# Altium PCB Sim908_Main Chip_Version 3.PcbDoc
Units mil, origin at the board's own origin, x right, y up, seen from the top; angles counter-clockwise.
Board outline 6000 x 4000 mil, 2 copper layers (Top Layer, Bottom Layer); 53 components, 0 nets, 237 pads, 78 vias.
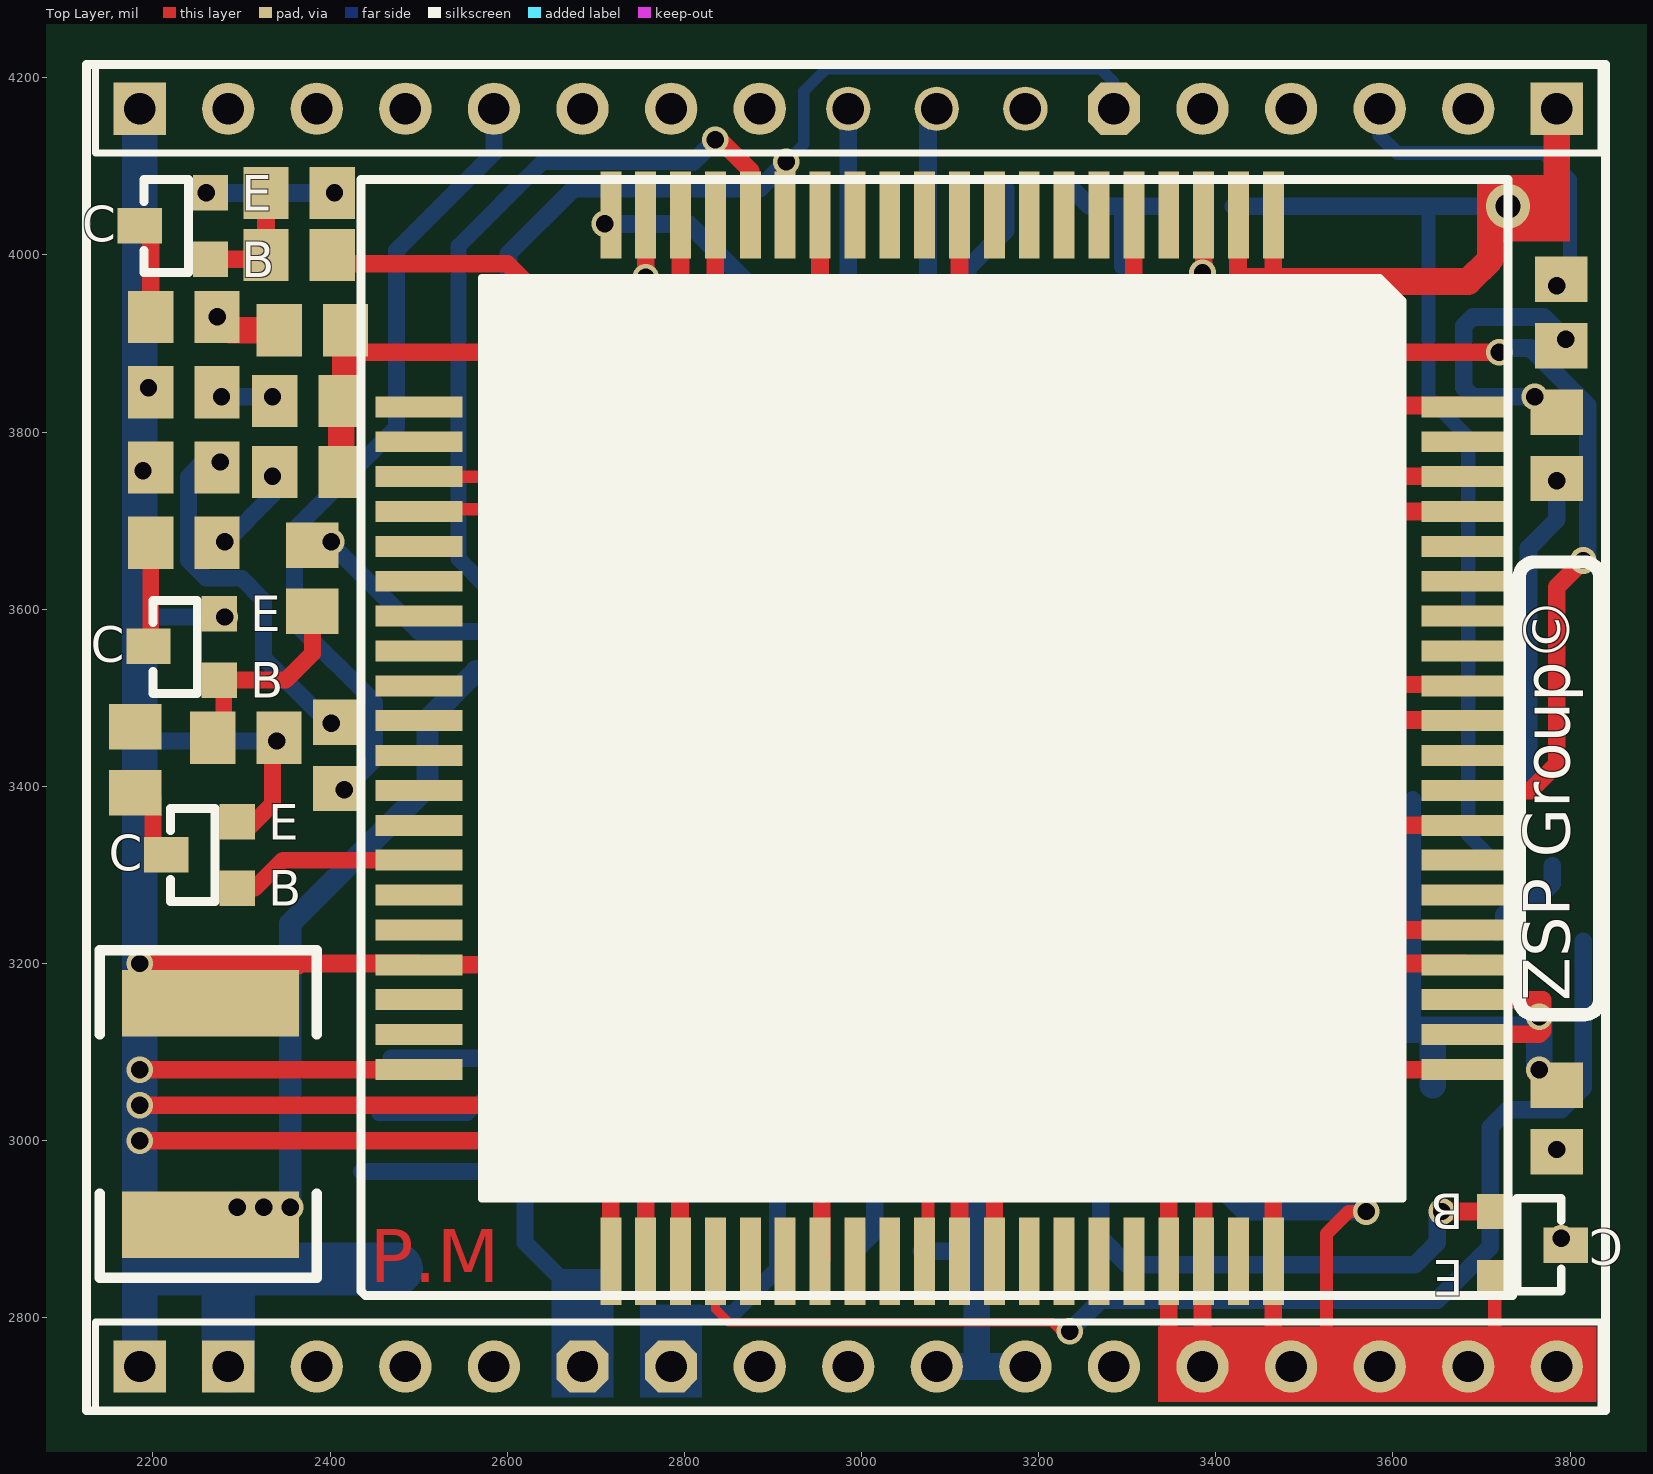
[diagram p0: Top Layer view]
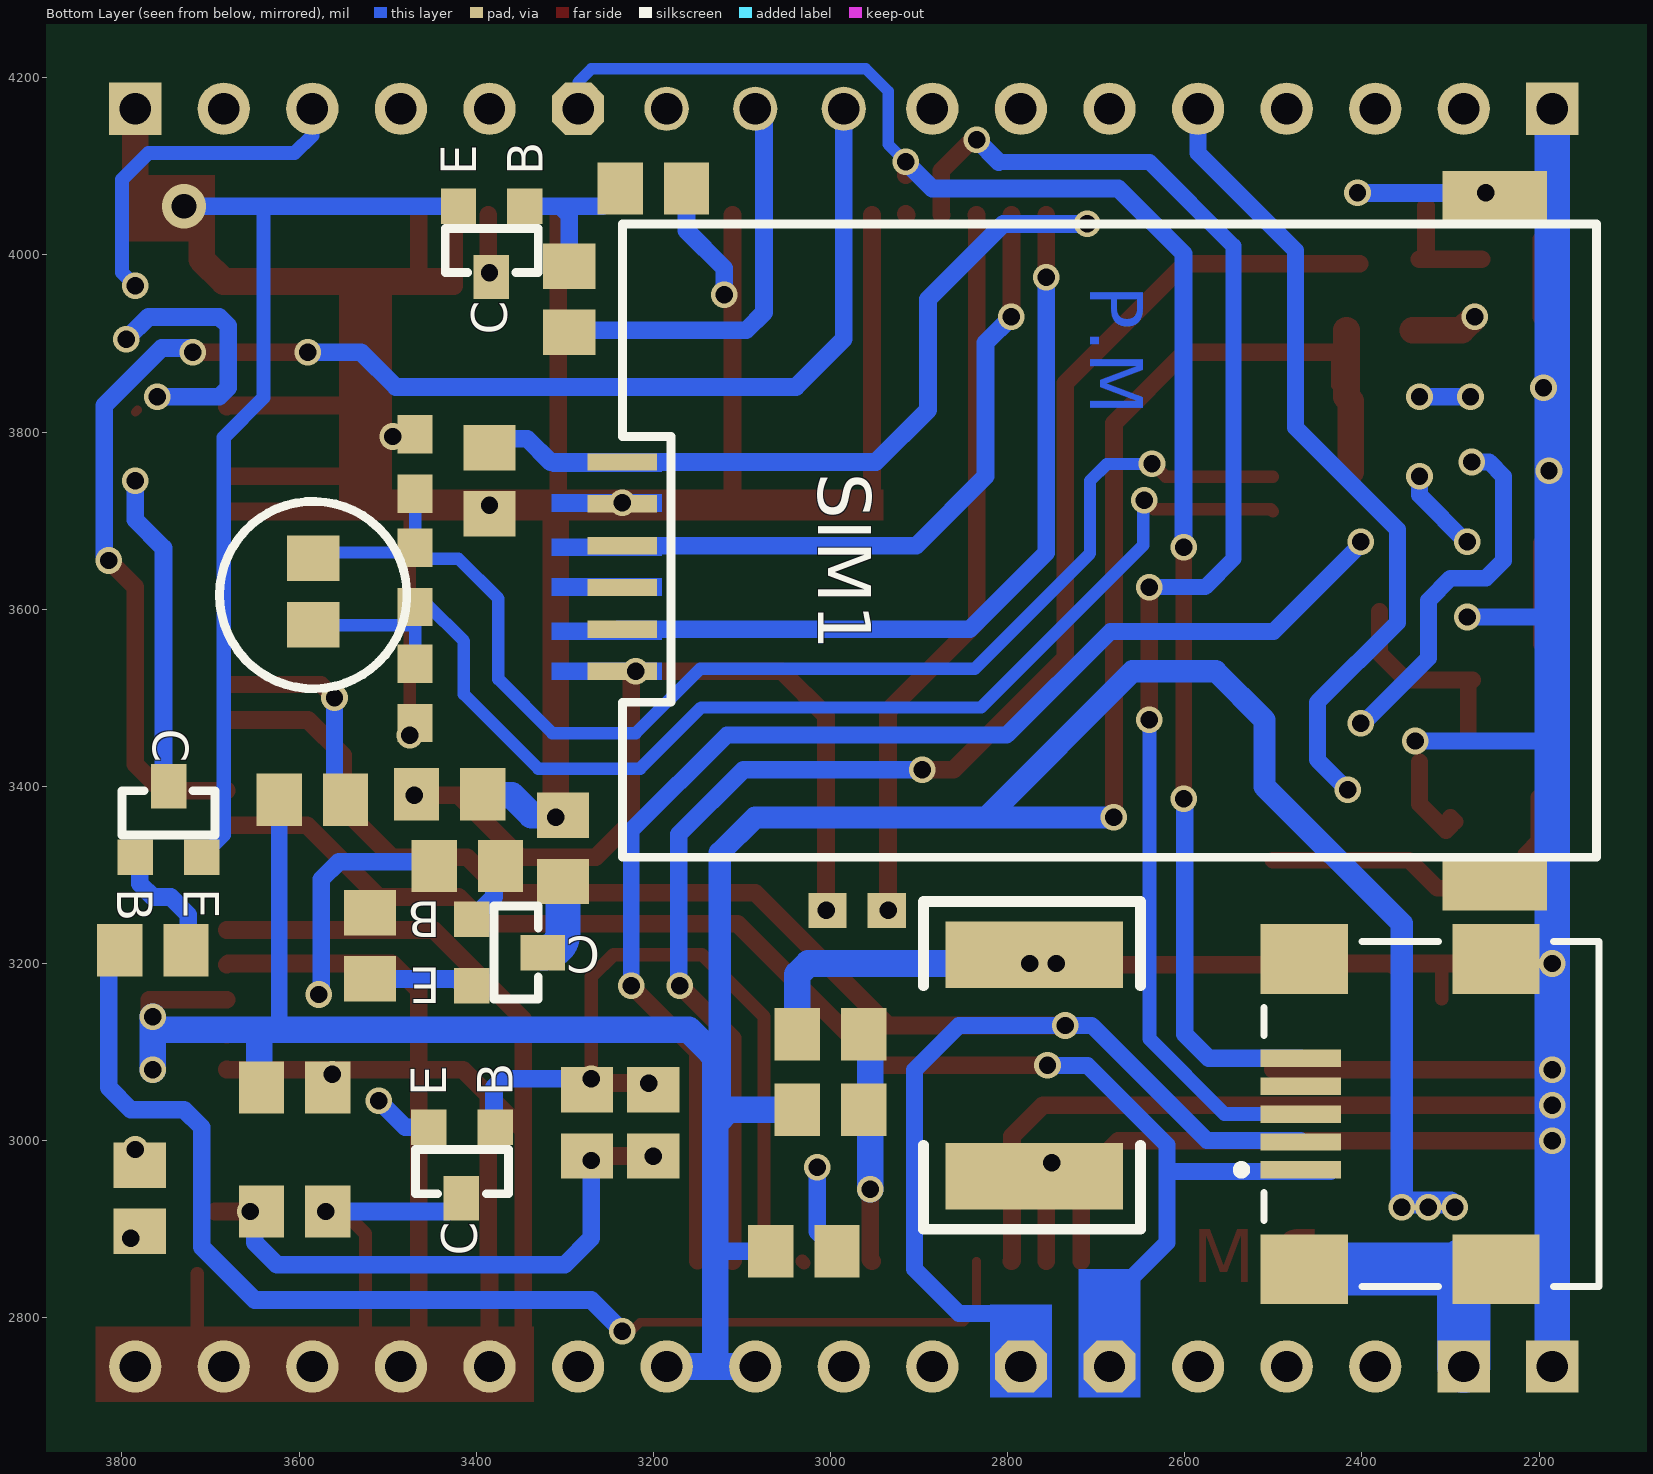
[diagram p1: Bottom Layer view, seen from below]

## Layer stack, top to bottom
Top Solder: solder mask 0.4, Solder Resist, Dk 3.5
Top Layer: signal copper 1.4
Dielectric1: dielectric 12.6, FR-4, Dk 4.8
Bottom Layer: signal copper 1.4
Bottom Solder: solder mask 0.4, Solder Resist, Dk 3.5

## Board outline
1000,1000 7000,1000 7000,5000 1000,5000

## Design rules (kind name [scope] priority, off if disabled: settings)
Clearance [All] p1: gap=10
PolygonConnect [All] p1: connectstyle=Relief reliefconductorwidth=10 reliefentries=4 polygonreliefangle="90 Angle" airgapwidth=10
RoutingVias [All] p1: holewidth=28 width=50 viastyle="Through Hole" minholewidth=28 minwidth=50 maxholewidth=28 maxwidth=50
SilkToSolderMaskClearance SilkscreenOverComponentPads [IsPad] p1: minsilkscreentomaskgap=10 clearancetoexposedcopper=TRUE
SolderMaskExpansion [All] p1: expansion=4
UnpouredPolygon [All] p1: allowunpoured=FALSE
Width [All] p1: maxlimit=10 minlimit=10 preferedwidth=10
28 further rules are at their usual default settings.

## Components (designator, comment, footprint, x,y, rotation, side; value= is the part's Value field where it differs from the comment)
SIM1 "SIMCard1" SIMCard1 3235,3530 r270 bottom locked
? "Comment" 2012[0805] 3584,3620 r90 bottom
? "Comment" 1608[0603] 3469,3505 r270 bottom
? "Comment" 1608[0603] 3469,3636 r270 bottom
? "Comment" 1608[0603] 3469,3764 r270 bottom
? "Comment" 2012[0805] 3302,3330 r270 bottom
? "Comment" 1608[0603] 2970,3260 r0 bottom
? "Comment" Sim908 3465,4045 r270 top locked
? "Comment" 2012[0805] 2180,3430 r270 top
? "Comment" SMD-tr 2295,3285 r0 top
? "Comment" SMD-tr 2275,3520 r0 top
? "Comment" 2012[0805] 2305,3455 r180 top
? "Comment" 2012[0805] 2380,3635 r90 top
? "Comment" 2012[0805] 3585,3385 r0 bottom
? "Comment" 2012[0805] 2375,3835 r180 top
? "Comment" SMD-tr 2265,3995 r0 top
? "Comment" 2012[0805] 2365,4000 r180 top
? "Comment" 2012[0805] 2365,4070 r180 top
? "Comment" 2012[0805] 2235,3675 r180 top
? "Comment" 2012[0805] 2235,3760 r180 top
? "Comment" 2012[0805] 2235,3845 r180 top
? "Comment" 2012[0805] 2235,3930 r180 top
? "Comment" 2012[0805] 3000,3035 r0 bottom
? "Comment" 2012[0805] 3000,3120 r0 bottom
? "Comment" 2012[0805] 3295,3950 r90 bottom
? "Comment" SMD-tr 3345,4055 r90 bottom
? "Comment" 2012[0805] 3200,4075 r180 bottom
? "Comment" HDR1X17#1 2185,2745 r0 top
? "Comment" HDR1X17#2 2185,4165 r0 top
? "Comment" USB/SM0.8-6H5 2160,3030 r180 bottom
? "Comment" 2012[0805] 3385,3745 r270 bottom
? "Comment" 2012[0805] 3430,3391 r0 bottom
? "Comment" 2220#1 2770,3110 r270 bottom
? "Comment" 2012[0805] 2380,3915 r180 top
? "Comment" 2012[0805] 2375,3755 r180 top
? "Comment" 2012[0805] 2410,3435 r270 top
? "Comment" 2012[0805] 3785,3025 r90 top
? "Comment" 2012[0805] 3275,3020 r270 bottom
? "Comment" SMD-tr 3715,2920 r180 top
? "Comment" 2012[0805] 3780,2935 r270 bottom
? "Comment" 2012[0805] 3605,3060 r0 bottom
? "Comment" 2012[0805] 3605,2920 r180 bottom
? "Comment" 2220#2 2265,3155 r270 top
? "Comment" SMD-tr 3785,3320 r270 bottom
? "Comment" 2012[0805] 3765,3215 r0 bottom
? "Comment" 2012[0805] 3790,3935 r90 top
? "Comment" 2012[0805] 3785,3785 r270 top
? "Comment" 2012[0805] 3410,3310 r0 bottom
? "Comment" 2012[0805] 3520,3220 r90 bottom
? "Comment" SMD-tr 3405,3250 r0 bottom
? "Comment" SMD-tr 3378.7,3015 r90 bottom
? "Comment" 2012[0805] 3200,3020 r270 bottom
? "Comment" 2012[0805] 3030,2875 r0 bottom

## Footprints (in the part's own frame and the unit in brackets; to place one, negate y for a bottom-side part, rotate by r counter-clockwise, add the part's x,y. Pads: shape width x height; smd on the part's side, far side on the other; paste and mask are expansions set on the pad)
1608[0603] [mm] "Chip Capacitor; Body 1.6 x 0.8 mm (LxW typ)"
  rect 1.1x1 smd: 1(-0.85,0) 2(0.85,0)
2012[0805] [mm] "Chip Resistor; Body 2.0 x 1.3 mm (LxW typ)"
  rect 1.3x1.5 smd: 1(-0.95,0) 2(0.95,0)
2220#1 [mil]
  rect 75x200 smd: 1(-100,0) 2(150,0)
  silkscreen extent -160,-125 210,120
2220#2 [mil]
  rect 75x200 smd: GND(0,0) VCC(250,0)
  silkscreen extent -60,-125 310,120
HDR1X17#1 [mm] "Connector; Header; 17 Position"
  round 1.5 hole 0.9: 3(5.08,0) 4(7.62,0) 5(10.16,0) 8(17.78,0) 9(20.32,0) 12(27.94,0) GND(33.02,0) GND(35.56,0) GND(38.1,0) GND(40.64,0) GND13(30.48,0) VCC10(22.86,0) VCC11(25.4,0)
  rect 1.5x1.5 hole 0.9: GND(0,0) GND(2.54,0)
  oct 1.5x1.5 hole 0.9: RX6(12.7,0) TX7(15.24,0)
  silkscreen extent -1.27,-1.27 41.91,1.27
HDR1X17#2 [mm] "Connector; Header; 17 Position"
  rect 1.5x1.5 hole 0.9: 1(0,0) 17(40.64,0)
  round 1.5 hole 0.9: 2(2.54,0) 3(5.08,0) 4(7.62,0) 5(10.16,0) 6(12.7,0) 7(15.24,0) 8(17.78,0) 13(30.48,0) 14(33.02,0) 15(35.56,0) 16(38.1,0)
  round 1.27 hole 0.9: 9(20.32,0) 10(22.86,0) 11(25.4,0)
  oct 1.5x1.5 hole 0.9: 12(27.94,0)
  silkscreen extent -1.27,-1.27 41.91,1.27
Sim908 [mm]
  rect 2.5x0.6 smd: 1(0,0) 2(0,-1) 3(0,-2) 4(0,-3) 5(0,-4) 6(0,-5) 7(0,-6) 8(0,-7) 9(0,-8) 10(0,-9) 11(0,-10) 12(0,-11) 13(0,-12) 14(0,-13) 15(0,-14) 16(0,-15) 17(0,-16) 18(0,-17) 19(0,-18) 20(0,-19) 41(30,-19) 42(30,-18) 43(30,-17) 44(30,-16) 45(30,-15) 46(30,-14) 47(30,-13) 48(30,-12) 49(30,-11) 50(30,-10) 51(30,-9) 52(30,-8) 53(30,-7) 54(30,-6) 55(30,-5) 56(30,-4) 57(30,-3) 58(30,-2) 59(30,-1) 60(30,0)
  rect 0.6x2.5 smd: 21(5.5,-24.5) 22(6.5,-24.5) 23(7.5,-24.5) 24(8.5,-24.5) 25(9.5,-24.5) 26(10.5,-24.5) 27(11.5,-24.5) 28(12.5,-24.5) 29(13.5,-24.5) 30(14.5,-24.5) 31(15.5,-24.5) 32(16.5,-24.5) 33(17.5,-24.5) 34(18.5,-24.5) 35(19.5,-24.5) 36(20.5,-24.5) 37(21.5,-24.5) 38(22.5,-24.5) 39(23.5,-24.5) 40(24.5,-24.5) 61(24.5,5.5) 62(23.5,5.5) 63(22.5,5.5) 64(21.5,5.5) 65(20.5,5.5) 66(19.5,5.5) 67(18.5,5.5) 68(17.5,5.5) 69(16.5,5.5) 70(15.5,5.5) 71(14.5,5.5) 72(13.5,5.5) 73(12.5,5.5) 74(11.5,5.5) 75(10.5,5.5) 76(9.5,5.5) 77(8.5,5.5) 78(7.5,5.5) 79(6.5,5.5) 80(5.5,5.5)
  silkscreen extent 1.79,-22.72 28.22,3.71
SIMCard1 [mm]
  rect 1.524x3 smd: 0(-13.589,25.019) 0(6.096,25.019)
  rect 0.5x2 smd: 1(SIM-VCC)(-6,0) 2(SIM_RST)(-3.6,0) 3(SIM_CLK)(-1.2,0) 4(GND)(-4.8,0) 5(-2.4,0) 6(SIM_DATA)(0,0)
  silkscreen extent -12.83,0 5.33,27.94
SMD-tr [mil]
  rect 40x40 smd: 1(0,0) 2(0,75)
  rect 50x40 smd: 3(-80,38)
  silkscreen extent -75,-15 -25,90
USB/SM0.8-6H5 [mm] "Connector; USB2.0, Type B, SM; 5 Position; Right Angle"
  rect 2.3x0.5 smd: 1(-7.85,-1.6) 2(-7.85,-0.8) 3(-7.85,0) 4(-7.85,0.8) 5(-7.85,1.6)
  rect 2.5x2 smd: 6(-7.75,4.45) 7(-2.25,4.45) 8(-7.75,-4.45) 9(-2.25,-4.45)
  round 0 all layers, no hole: MH1(-5.25,2.2) MH2(-5.25,-2.2)
  silkscreen extent -9.68,-4.95 0.7,4.95

## Via types
v1: diameter 30, hole 19.68, Top Layer to Bottom Layer, tented both sides, 62 vias
v2: diameter 30, hole 19.68, Top Layer to Bottom Layer, 15 vias
v3: diameter 50, hole 28, Top Layer to Bottom Layer, tented both sides, 1 vias

## Nets (pads, with @x,y where several pads share a name; then routed paths per layer and width w, separated by ;. In a path a pad name is that pad's centre, name@x,y a point inside that pad or via, vN(x,y) a via of type N, cw(c..) or ccw(c..) an arc to the next point about the centre after c; other vN are vias at no path point)
pads on no net: ?.1 ?.2 ?.3 ?.4 ?.5 ?.6 ?.7 ?.8 ?.9 ?.10 ?.11 ?.12 ?.13 ?.14 ?.15 ?.16 ?.17 ?.18 ?.19 ?.20 ?.21 ?.22 ?.23 ?.24 ?.25 ?.26 ?.27 ?.28 ?.29 ?.30 ?.31 ?.32 ?.33 ?.34 ?.35 ?.36 ?.37 ?.38 ?.39 ?.40 ?.41 ?.42 ?.43 ?.44 ?.45 ?.46 ?.47 ?.48 ?.49 ?.50 ?.51 ?.52 ?.53 ?.54 ?.55 ?.56 ?.57 ?.58 ?.59 ?.60 ?.61 ?.62 ?.63 ?.64 ?.65 ?.66 ?.67 ?.68 ?.69 ?.70 ?.71 ?.72 ?.73 ?.74 ?.75 ?.76 ?.77 ?.78 ?.79 ?.80 ?.GND ?.GND13 ?.MH1 ?.MH2 ?.RX6 ?.TX7 ?.VCC ?.VCC10 ?.VCC11 SIM1.0 SIM1.1(SIM-VCC) SIM1.2(SIM_RST) SIM1.3(SIM_CLK) SIM1.4(GND) SIM1.5 SIM1.6(SIM_DATA)
copper on no net: | length 45195.2
  Top Layer w10: 2412.4,3835 2430,3852.6 2430,3890 ; 2835.08,2863.9 2835,2863.82 2835,2810 2850,2795 3215,2795 3225,2785 v1(3235,2785) ; v1(3220,3530) v1@3225,3525 ; v1@3385,3970 v1(3385,3980) ; 3782.4,3825 3785,3822.4
  Top Layer w14: 2500.43,3710.35 2503.08,3713 2635,3713 v1@2648,3726 ; 2500.43,3749.72 2621.72,3749.72 v1@2636,3764 ; v1(3475,3457.54) 3475,3722 3476,3723
  Top Layer w15: 2220,3175 2220,3195 2225,3200 ; 2260,3175 2260,3200 ; 2305,3200 2310,3195 2310,3160 ; 2360,3200 2365,3195 ; 3030,2861.97 3031.93,2863.9 ; 3071.3,2863.9 3075,2867.6 3075,2955 3075,3140 3145,3210 3245,3210 3270,3185 v1@3270,3065 ; 3525,2770 3525,2895 3550,2920 v1(3570,2920) ; 3715,2760 3715,2850
  Top Layer w19: 2197.6,3560.6 2197.6,3675 ; 2200,3387.6 2200,3338 2215,3323 ; 2280,3455 2280,3515 2275,3520 2350,3520 2380,3550 2380,3597.6 ; 2295,3285 2315,3285 2346.65,3316.65 2500.43,3316.65 ; 2295,3360 2300,3365 2300,3355 2305,3350 2335,3380 2335,3427.6 ; v1(2601.2,3386.2) v1@2601.2,3670 ; 3150.04,2863.9 3150,2863.94 3150,3060 3150,3100 v1(3225,3175) ; v1(3560,3500) 3575,3515 3680.04,3515 3681.54,3513.5
  Top Layer w20: v1(2185,3000) 2675,3000 2716.97,2958.03 2716.97,2863.9 ; v1(2185,3040) 2760,3040 2795,3005 2795,2864.61 2795.71,2863.9 ; v1(2185,3080) 2500,3080 2500.43,3080.43 ; v1(2185,3200) 2498.98,3200 2500.43,3198.54 2748.54,3198.54 v1@2750,3200 ; 2197.6,3930 2197.6,4017.6 ; 2265,3995 2335,3995 ; 2327.6,4000 2327.6,4055 ; 2402.4,3990 2600,3990 2735,3855 2735,3545 2861.2,3418.8 v1(2896.2,3418.8) ; 2430,3890 2600,3890 2680,3810 2680,3690 v1(2680,3365) ; v1(2640,3475) v1(2640,3625) ; v1(2735,3130) 2935,3130 3085,3280 3370,3280 3410,3320 3495,3320 3550,3375 3550,3435 3590,3475 3680.67,3475 3681.54,3474.13 ; v1@2747.5,2972.5 2756.34,2963.66 2756.34,2863.9 ; v1@2749.27,3199.27 2774.27,3199.27 v1(2775,3200) ; v1(2755,3085) 2945,3085 3105,3245 3390,3245 3420,3275 3510,3275 3580,3345 3591.02,3356.02 3681.54,3356.02 ; v1(2756.34,3975) 2756.34,4045 ; 2785,4165 2805,4165 ; v1(2795.71,3930) 2795.71,4045 ; 2835.08,4045 2835,4044.92 2835,3585 2910,3510 ; v1@2840,4130 2875,4095 2875,4045.55 2874.45,4045 ; 2900,3520 2935,3485 v1(2935,3260) ; 2913.82,4045 2915,4046.18 ; 2915,4090 v1(2915,4105) ; 2953.19,2863.9 2955,2865.71 v1(2955,2945) ; 2953.19,4045 2953.19,3721.81 2955,3720 v1(3235,3720) 3244.65,3710.35 3681.54,3710.35 ; v1(3005,3260) 3005,3480 3055,3530 v1(3220,3530) ; 3110,2864.57 3110.67,2863.9 3110.67,3115.67 v1(3170,3175) ; 3110.67,3724.33 3110.67,4045 ; v1(3200,2982.6) 3265,2982.6 v1(3270,2977.6) ; v1(3205,3065) 3265,3065 v1(3270,3070) ; v1@3225,3525 3225,3360 3265,3320 3350,3320 3420,3390 v1@3467.4,3390 ; 3307.52,3720 3307.52,3982.52 3307.52,4045 ; 3346.89,2761.89 3346.89,2863.9 3346.89,3011.89 3415,3080 3530,3080 3681.1,3080 3681.54,3080.43 ; 3346.89,3000 3346.89,3136.89 3447.91,3237.91 3681.54,3237.91 ; 3385,2745 3385,2755 3385,2862.64 3386.26,2863.9 ; 3385,2865.16 3386.26,2863.9 ; v1(3385,3980) 3386.26,3981.3 3386.26,4045 ; 3386.26,3050 3386.26,2863.9 ; 3425,3965 3425,4044.37 3425.63,4045 ; 3465,2745 3465,2863.9 3465,3080 3465,3170 3495,3200 3680.08,3200 3681.54,3198.54 ; 3465,4045 3465,3975 3470,3970 ; 3540,3750 3681.26,3750 3681.54,3749.72 ; 3540,3830 3680,3830 3681.54,3828.46 ; v1(3590,3890) v1(3720,3890) ; v1(3655,2920) 3695,2920 ; 3681.54,3119.8 3681.73,3120 3765,3120 3769.17,3124.17 3769.17,3159.17 3681.54,3159.17 ; 3681.54,3395.39 3681.93,3395 3755,3395 3785,3425 3785,3625 v1(3815,3655)
  Top Layer w30: v1(2272.4,3930) 2287.4,3915 2342.6,3915 ; 2412.4,3755 2412.4,3835 ; 2417.4,3840 2417.4,3915 ; v1(3235,3720) 3310,3720 3540,3720 3540,3970 ; v1(3310,3365) 3310,3710.35 ; 3430,3970 3685,3970 3710,3995 3710,4052.6 3712.4,4055 3765,4055 3785,4075 3785,4165
  Bottom Layer w10: 3285,4165 3285,4195 ; 3295,3987.4 3307.6,4000 ; 3315,3765 3316.22,3766.22 ; 3415,4055 3420,4055 ; 3717.6,3230 3725,3237.4 ; 3750,3420 3760,3410
  Bottom Layer w13: v1(2915,4105) 2935,4125 2935,4165 2935,4185 2960,4210 3000,4210 3270,4210 3285,4195
  Bottom Layer w14: v1(2637,3764) 2688,3764 2707,3745 2707,3663 2837,3533 3147,3533 3220,3460 3314,3460 3375,3521 3375,3612 3420,3657 3466,3657 ; v1(2646,3723) 2647,3722 2647,3672 2830,3489 3146,3489 3215,3420 3330,3420 3414,3504 3414,3564 3456,3606 ; 3469,3538.46 3469,3602.54 ; 3469,3730.54 3469,3669.46 3474.46,3664 3574,3664 ; 3472,3582 3569,3582 3573,3586
  Bottom Layer w15: 3642.4,3060 3645,3062.6 ; v1(3270,2977.6) 3272.4,2980 v1(3270,2977.6)
  Bottom Layer w16: 2455,3030 2555,3030 2640,3115 2640,3205 2640,3315 v1(2640,3475) ; 3585,4165 3585,4135 3605,4115 3770,4115 3800,4085 3800,3980 v1(3785,3965) ; 3640,4055 3640,3925 3640,3839 3685,3794 3685,3345 3710,3320
  Bottom Layer w18: v1(2640,3625) 2577,3625 2545,3657 2545,4010 2640,4105 2810,4105
  Bottom Layer w19: 2190,3585 2196.2,3591.2 v2(2281.2,3591.2) ; 2201.2,3451.2 v2(2340,3451.2) ; v2(2276.2,3766.2) 2256.2,3766.2 2240,3750 2240,3655 2260,3635 2300,3635 2325,3610 2325,3545 v2@2400,3470 ; v2@2281.2,3675 2335,3728.8 v2(2335,3750) ; v2@2400,3675 2500,3575 2684,3575 2801,3458 3117,3458 3225,3350 v1(3225,3175) ; v2@2415,3395 2450,3430 2450,3495 2360,3585 2360,3690 2390,3720 2475,3805 2475,4005 2585,4115 2585,4165 ; 2435.55,2965 2620,2965 2620,2990 ; 2469.06,3000 2575,3000 2705,3130 v1(2735,3130) 2855,3130 2870,3115 2905,3080 2905,2855 2855,2805 2800,2805 ; 2685,2745 2680,2750 2680,2825 2620,2885 2620,2995 2710,3085 v1(2755,3085) ; 2785,2745 2785,2760 ; 3560,3380 v1(3560,3500) ; 3622.4,3130 3622.4,3385
  Bottom Layer w20: v2(2277.4,3840) v2(2335,3840) ; 2280,4070 v1@2402.4,4070 ; 2469.06,3092.99 2572.99,3092.99 2600,3120 v1@2600,3385 ; v1@2601.34,3670 2601.34,4001.34 2675,4075 2735,4075 2885,4075 v1(2915,4105) ; v1(2710,4035) 2805,4035 2890,3950 2890,3825 2948.78,3766.22 3240,3766.22 3316.22,3766.22 3342.4,3792.4 3385,3792.4 ; v1(2756.34,3975) 2756.34,3663.66 2842.76,3577.24 3240,3577.24 ; v1(2795.71,3930) 2825,3900.71 2825,3750 2903.27,3671.73 3240,3671.73 ; 2810,4105 v1(2835,4130) ; v1(2896.2,3418.8) 3098.2,3418.8 3171.2,3345.8 v1@3171.2,3175 ; 2985,4165 2985,3905 3039,3851 3491,3851 3530,3890 v1(3590,3890) ; 2992.6,2875 3015,2897.4 3015,2960 v1(3015,2970) ; 3067.4,2875 3130,2875 ; 3085,4165 3075,4155 3075,3935 3095,3915 3292.6,3915 3295,3912.6 ; v1(3120,3955) 3120,3985 3162.6,4027.6 3162.6,4075 ; 3125,3025 3130,3020 ; 3135,3015 3135,3100 ; v1(3235,2785) 3270,2820 3650,2820 3710,2880 3710,3015 3730,3035 3790,3035 3815,3060 3815,3225 ; 3237.4,4075 3257.4,4055 3345,4055 3305,4055 3295,4045 3295,3987.4 ; v1@3270,2990 3270,2890 3300,2860 3400,2860 3625,2860 3650,2885 3650,2915 v1(3655,2920) ; 3290,3070 3370,3070 3380,3060 3380,3016.3 3378.7,3015 3370,3023.7 ; 3380,3300 3380,3275 3405,3250 ; 3415,3175 3422.6,3182.6 3520,3182.6 ; 3416.7,2935 3431.7,2920 v1@3567.6,2920 ; 3420,4055 v3(3730,4055) ; 3453.7,3015 3480,3015 v1(3510,3045) ; v1@3575,3165 3575,3295 3555,3315 3452.4,3315 ; v1@3720,3895 3755,3895 3820,3830 3820,3660 v1(3815,3655) ; 3725,3237.4 3725,3255 3745,3275 3765,3275 3780,3290 3780,3310 ; 3753,3410 3753,3669 3785,3701 v1(3785,3745) ; v1(3760,3840) 3690,3840 3680,3850 3680,3920 3690,3930 3770,3930 v1(3795,3905) ; 3452.4,3315 3447.4,3310 3452.4,3315
  Bottom Layer w25: v2(2295,2925) 2300,2930 v1@2355,2930 ; v1(2355,2925) 2355,3245 2510,3400 2510,3475 2565,3530 2659,3530 2824,3365 2870,3365 ; v1(2680,3365) 3085,3365 3125,3325 3125,3025
  Bottom Layer w30: 2835,3200 3025,3200 3037.4,3187.6 3037.4,3120 ; v1(2955,2945) 2955,3117.4 2967.6,3130 ; 3037.4,3035 3115,3035 3130,3020 3130,2745 ; 3085,2745 3185,2745 ; 3135,3100 3160,3125 3765,3125 ; v1@3305,3367.6 3337.6,3367.6 3360,3390 3392.6,3390 ; 3645,3062.6 3645,3125 ; v1(3765,3080) v1(3765,3140)
  Bottom Layer w40: 2185,2745 2185,4165 ; 3302,3292.6 3302,3235 ccw(c3325,3235) 3325,3212
  Bottom Layer w60: 2200,2855 2475,2855 ; 2285,2745 2285,2860
  other v1: 2325,2925 2750,2975 3562.6,3075 3577.6,3165 2745,3200 3470,3390 2601,3670 3385,3717.6 3494,3795 2260,4070 2405,4070
  other v2: 3790,2890 3785,2990 2416.2,3396.2 2401.2,3471.2 2281.2,3676.2 2401.2,3676.2 2188.8,3756.2 2195,3850

## Other copper
Top Layer:
  rectangle: 3495,3705 3555,3985
  rectangle: 3695,4015 3800,4090
  rectangle: 3335,2705 3830,2790
  rectangle: 3410,2755 3420,2765
  rectangle: 3400,2765 3430,2775
  rectangle: 2940,3700 3440.63,3735
  text "P.M" at 2445,2840 h60
Bottom Layer:
  rectangle: 2650,2710 2720,2855
  rectangle: 2750,2710 2820,2815
  rectangle: 3190,3520 3315,3540
  rectangle: 3190,3565 3315,3585
  rectangle: 3190,3615 3315,3635
  rectangle: 3190,3660 3315,3680
  rectangle: 3190,3710 3315,3730
  rectangle: 3190,3755 3315,3775
  text "P.M" at 2707,3966 h60 r90

## Silkscreen, mask and mechanical layers (free items; w line width, h text height)
Top Overlay:
  region: 2570.71,2934.17 2570.71,3974.72 3585.28,3974.72 3597,3964 3611.26,3948.74 3611.26,2934.17
  lines w10: 2125,2695 2125,4215 3840,4215 3840,2695 2125,2695 ; 2435,2830 2440,2825 2455,2825 3735,2825 3730,2830 3730,4085 2435,4085 2435,2830
  lines w15: 3759.83,3653.23 ccw(c3759.83,3635.93) 3742.52,3635.93 3742.52,3159.49 ccw(c3759.83,3159.49) 3759.83,3142.19 3816.32,3142.19 ccw(c3816.32,3159.49) 3833.63,3159.49 3833.63,3635.93 ccw(c3816.32,3635.93) 3816.32,3653.23 ; 3760.83,3653.19 3817.32,3653.19
  text "ZSP Group©" at 3817,3157.6 h90 r90
Bottom Overlay:
  circle w10: c3584,3616 r105.76

## Text inside footprints (layer, text, board x,y; h text height)
?: Bottom Overlay "C" at 3365,3910 h40 r270; Bottom Overlay "E" at 3400,4090 h40 r270; Bottom Overlay "B" at 3325,4090 h40 r270
?: Bottom Overlay "C" at 3765,3465 h40 r90; Bottom Overlay "E" at 3730,3285 h40 r90; Bottom Overlay "B" at 3805,3285 h40 r90
?: Bottom Overlay "C" at 3260,3230 h40 r180; Bottom Overlay "E" at 3440,3195 h40 r180; Bottom Overlay "B" at 3440,3270 h40 r180
?: Bottom Overlay "C" at 3398.7,2870 h40 r270; Bottom Overlay "E" at 3433.7,3050 h40 r270; Bottom Overlay "B" at 3358.7,3050 h40 r270
?: Mechanical 1 "PCB Edge" at 2142.98,2871.09 h9.84 r270
?: Top Overlay "C" at 2150,3305 h40; Top Overlay "E" at 2330,3340 h40; Top Overlay "B" at 2330,3265 h40
?: Top Overlay "C" at 2130,3540 h40; Top Overlay "E" at 2310,3575 h40; Top Overlay "B" at 2310,3500 h40
?: Top Overlay "C" at 2120,4015 h40; Top Overlay "E" at 2300,4050 h40; Top Overlay "B" at 2300,3975 h40
?: Top Overlay "C" at 3860,2900 h40 r180; Top Overlay "E" at 3680,2865 h40 r180; Top Overlay "B" at 3680,2940 h40 r180